# Altium PCB Lab2_PCB.PcbDoc
Units mil, origin at the board's own origin, x right, y up, seen from the top; angles counter-clockwise.
Board outline 1665 x 695 mil, 2 copper layers (Top Layer, Bottom Layer); 15 components, 10 nets, 36 pads, 0 vias.
Unrouted connection lines stored in the file: 26.
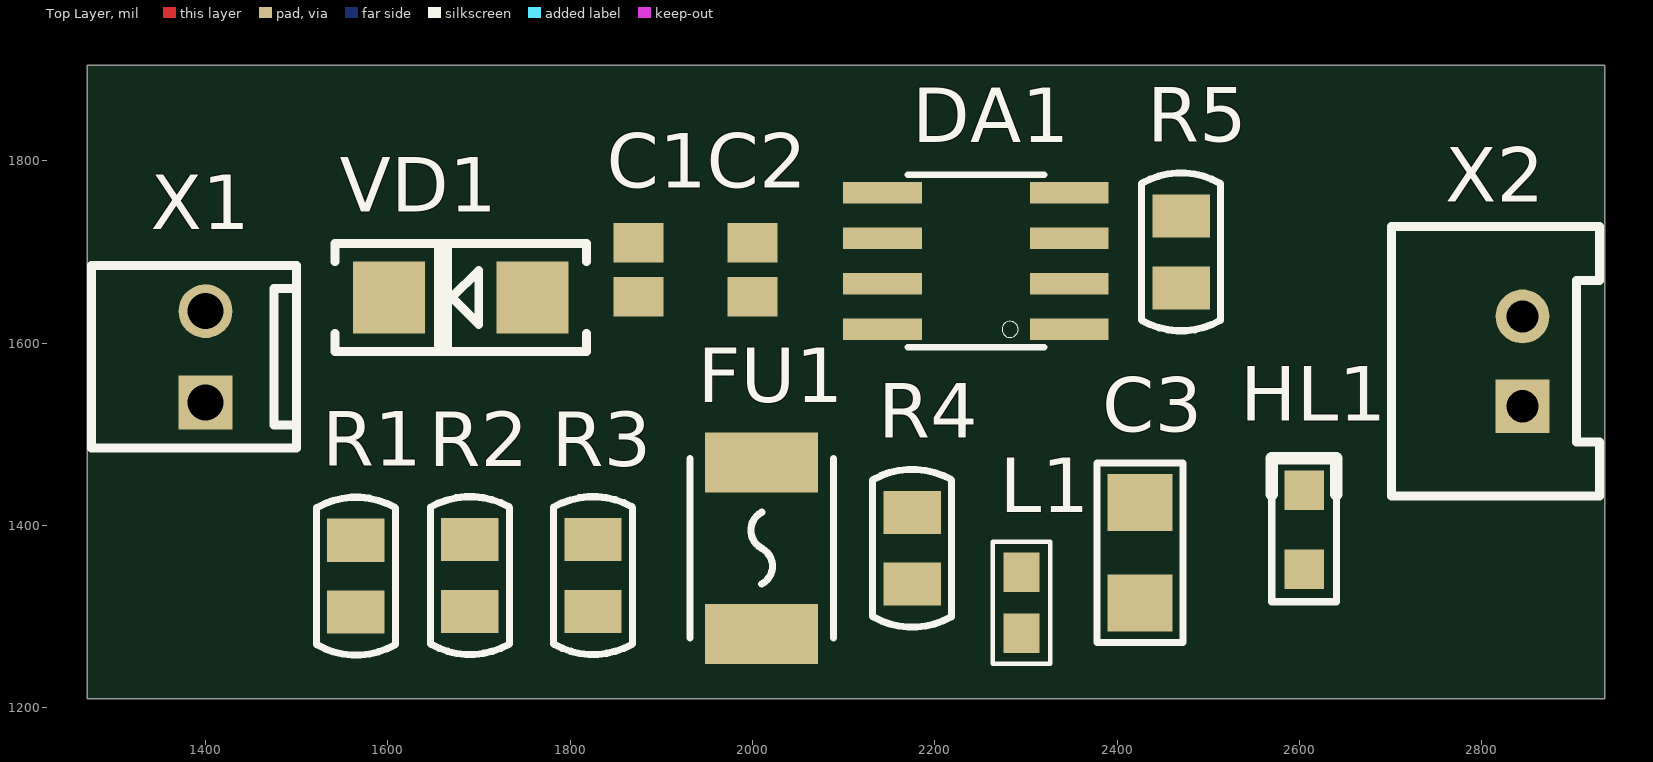
[diagram p0: Top Layer view]
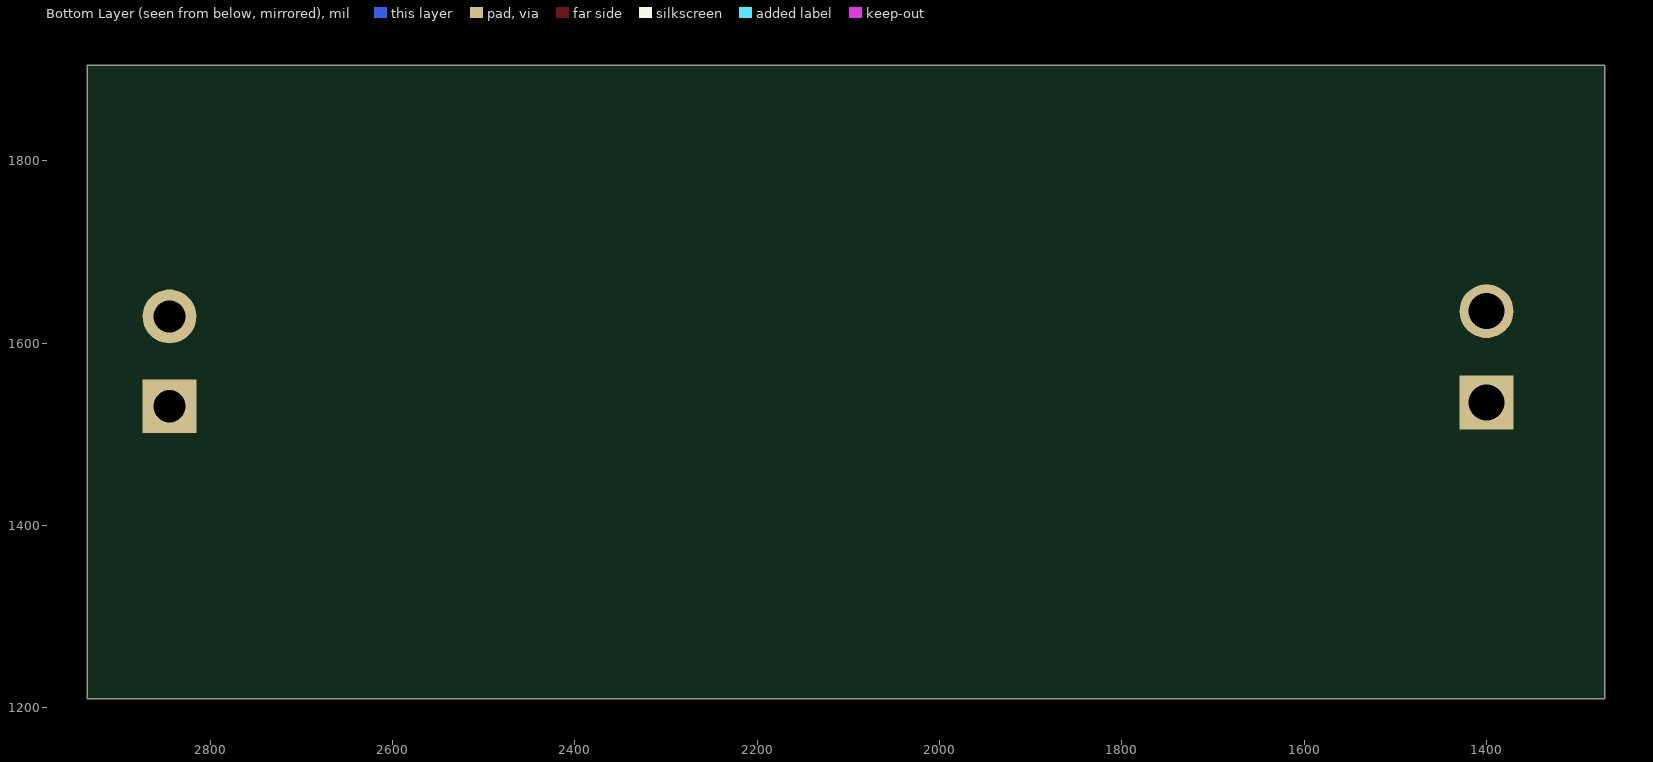
[diagram p1: Bottom Layer view, seen from below]

## Layer stack, top to bottom
Top Solder: solder mask 0.4, Solder Resist, Dk 3.5
Top Layer: signal copper 1.4
Dielectric 1: dielectric 12.6, FR-4, Dk 4.8
Bottom Layer: signal copper 1.4
Bottom Solder: solder mask 0.4, Solder Resist, Dk 3.5

## Board outline
1270,1210 2935,1210 2935,1905 1270,1905

## Design rules (kind name [scope] priority, off if disabled: settings)
Clearance [All] p1: gap=10 ignorepadtopadclearanceinfootprint=FALSE except(0: Arc-Hole Track-Hole SMDPad-Hole THPad-Hole Via-Hole Fill-Hole Poly-Hole Region-Hole Text-Hole)
PolygonConnect [All] p1: connectstyle=Relief reliefconductorwidth=10 reliefentries=4 polygonreliefangle="90 Angle" airgapwidth=10
RoutingVias [All] p1: holewidth=28 width=50 viastyle="Through Hole" minholewidth=28 minwidth=50 maxholewidth=28 maxwidth=50
SolderMaskExpansion [All] p1: expansion=4
Width [All] p1: maxlimit=10 minlimit=10 preferedwidth=10
30 further rules are at their usual default settings.

## Components (designator, comment, footprint, x,y, rotation, side; value= is the part's Value field where it differs from the comment)
C1 "Capacitor-E" C0805 1875,1680.47 r270 top
C2 "Capacitor" C0805 2000,1680.47 r90 top
C3 "Capacitor-E" C1206 2425,1370 r90 top
DA1 "MC34063A" PCBComponent_1 2245,1690 r90 top
FU1 "Fuse" F1812 2010,1375 r270 top value=1.5A
HL1 "LED_3V" LD0805 2605,1395 r90 top
L1 "Coil" КИВ-18 2295,1315 r90 top value=40мк
R1 "Resistor_20,0W" R0805 1565,1344.37 r90 top
R2 "Resistor_0,25W" R0805 1690,1345 r90 top
R3 "Resistor_0,25W" R0805 1825,1345 r90 top value=1.5к
R4 "Resistor_0,25W" R0805 2175,1375 r90 top value=13к
R5 "Resistor_10,0W" R0805 2470,1700 r90 top
VD1 "Schottky" DO-214AC 1680,1650 r180 top
X1 "Vin" WF-2 1400,1585 r270 top
X2 "Vout" CWF-2 2815,1580 r90 top

## Footprints (in the part's own frame and the unit in brackets; to place one, negate y for a bottom-side part, rotate by r counter-clockwise, add the part's x,y. Pads: shape width x height; smd on the part's side, far side on the other; paste and mask are expansions set on the pad)
C0805 [mm] "Chip Capacitor, Body 2.0x1.3mm, IPC High Density"
  rect 1.1x1.4 smd: 1(-0.75,0) 2(0.75,0)
  body extent -1.1,-0.72 1.1,0.72, height 1.4
C1206 [mm] "3216M"
  rect 1.6x1.8 smd: 1(-1.4,0) 2(1.4,0)
  silkscreen extent -2.5,-1.2 2.5,1.2, body extent -1.6,-0.8 1.6,0.8, height 1.01
CWF-2 [mm]
  rect 1.5x1.5 hole 0.9: 1(-1.25,-0.75)
  round 1.5 hole 0.9: 2(1.25,-0.75)
  silkscreen extent -3.75,-2.9 3.75,2.9, body extent -3.75,-2.85 3.75,2.9, height 7.2
DO-214AC [mm] "(SMA) Low profile package"
  rect 2x2 smd: 1(-2,0) 2(2,0)
  silkscreen extent -3.5,-1.5 3.5,1.5, body extent -2.6,-1.3 2.6,1.3, height 2.4
F1812 [mm]
  rect 1.68x3.15 smd: 1(-2.39,0) 2(2.39,0)
  silkscreen extent -2.5,-2 2.5,2, body extent -2.36,-1.74 2.37,1.74, height 1.04
LD0805 [mm]
  rect 1.1x1.1 smd: 1(-1.1,0) 2(1.1,0)
  silkscreen extent -2,-0.9 2,0.9, body extent -1,-0.62 1,0.63, height 0.73
PCBComponent_1 [mm]
  rect 0.6x2.2 smd: 1(-1.905,-2.6) 2(-0.635,-2.6) 3(0.635,-2.6) 4(1.905,-2.6) 5(1.905,2.6) 6(0.635,2.6) 7(-0.635,2.6) 8(-1.905,2.6)
  silkscreen extent -2.4,-1.9 2.4,1.9, body extent -2.45,-3.01 2.45,3.01, height 1.63
R0805 [mm] "2012M"
  rect 1.2x1.6 smd: 1(-1,0) 2(1,0)
  silkscreen extent -2.2,-1.1 2.2,1.1, body extent -1,-0.6 1,0.6, height 0.5
WF-2 [mm]
  rect 1.5x1.5 hole 1: 1(1.27,0)
  round 1.5 hole 1: 2(-1.27,0)
  silkscreen extent -2.54,-3.18 2.54,2.54, body extent -2.54,-3.18 2.54,2.62, height 11.76
КИВ-18 [mm] "1608M"
  rect 1.1x1 smd: 1(-0.85,0) 2(0.85,0)
  Top Layer pour cut-out: -0.3,0.5 0.3,0.5 0.3,-0.5 -0.3,-0.5
  silkscreen extent -1.7,-0.8 1.7,0.8, body extent -0.82,-0.43 0.82,0.43, height 0.8

## Part data
HL1: library part Led-1, Published=03.12.2013, Publisher="Andrew Danich", Type="Индикатор единичный", Произв. номер=SMLE13EC8TT86, Прямое напряжение=3В, Прямой ток=0.5А, Цвет=Синий
L1: library part КИВ18-100, DC Resistance=1.2ohm, Manufacturer="ОАО \"МСТАТОР\"", Rated Current=185mA, Tolerance=±10%, Working Temperature Max=+85°С, Working Temperature Min=-60°С, Application Category=5, ID=1, Part Number=КИВ18-100, Published=20.05.2010, Publisher="Andrew Danich", Q=20, Specification="КВШУ.670114.001 ТУ", Type=Дроссель
VD1: "BYV10-40", Type=Диод, Максимальное обратное напряжение=40В, Прямой ток="1 А"
C1 C3: Published=20.08.2010, Publisher="Олег Литвинов", Type=Конденсатор, Ёмкость=100мк, Напряжение=50В
C2: Published=18.05.2010, Publisher="Andrew Danich", Type=Конденсатор, Ёмкость=239, Напряжение=50В
FU1: Type="Вставка плавкая"
R1: Type=Резистор, Сопротивление=0.125
R2: Type=Резистор, Сопротивление=180
R3 R4: Type=Резистор
R5: Type=Резистор, Сопротивление=30
X1: Create=DeathSpeaker, GND=GND, In=D+, Out=D-, U=+(5-9)В
X2: Create=DeathSpeaker, GND=GND, U=+12В

## Nets (pads, with @x,y where several pads share a name; then routed paths per layer and width w, separated by ;. In a path a pad name is that pad's centre, name@x,y a point inside that pad or via, vN(x,y) a via of type N, cw(c..) or ccw(c..) an arc to the next point about the centre after c; other vN are vias at no path point)
GND: C1.2 C2.1 C3.2 DA1.2 DA1.4 HL1.2 R3.1 X1.2 X2.2
NetC1_1: C1.1 DA1.6 R1.1 X1.1
NetC2_2: C2.2 DA1.3
NetC3_1: C3.1 FU1.2 R4.2 R5.2 VD1.2
NetDA1_1: DA1.1 L1.2 VD1.1
NetDA1_5: DA1.5 R3.2 R4.1
NetDA1_7: DA1.7 L1.1 R1.2 R2.1
NetDA1_8: DA1.8 R2.2
NetFU1_1: FU1.1 X2.1
NetHL1_1: HL1.1 R5.1

## Silkscreen, mask and mechanical layers (free items; w line width, h text height)
Mechanical 19:
  the board outline again, w10